# Altium PCB RC PCB v2.PcbDoc
Units mm, origin at the board's own origin, x right, y up, seen from the top; angles counter-clockwise.
Board outline 85.85 x 53.09 mm, 2 copper layers (Top Layer, Bottom Layer); 35 components, 26 nets, 122 pads, 13 vias.
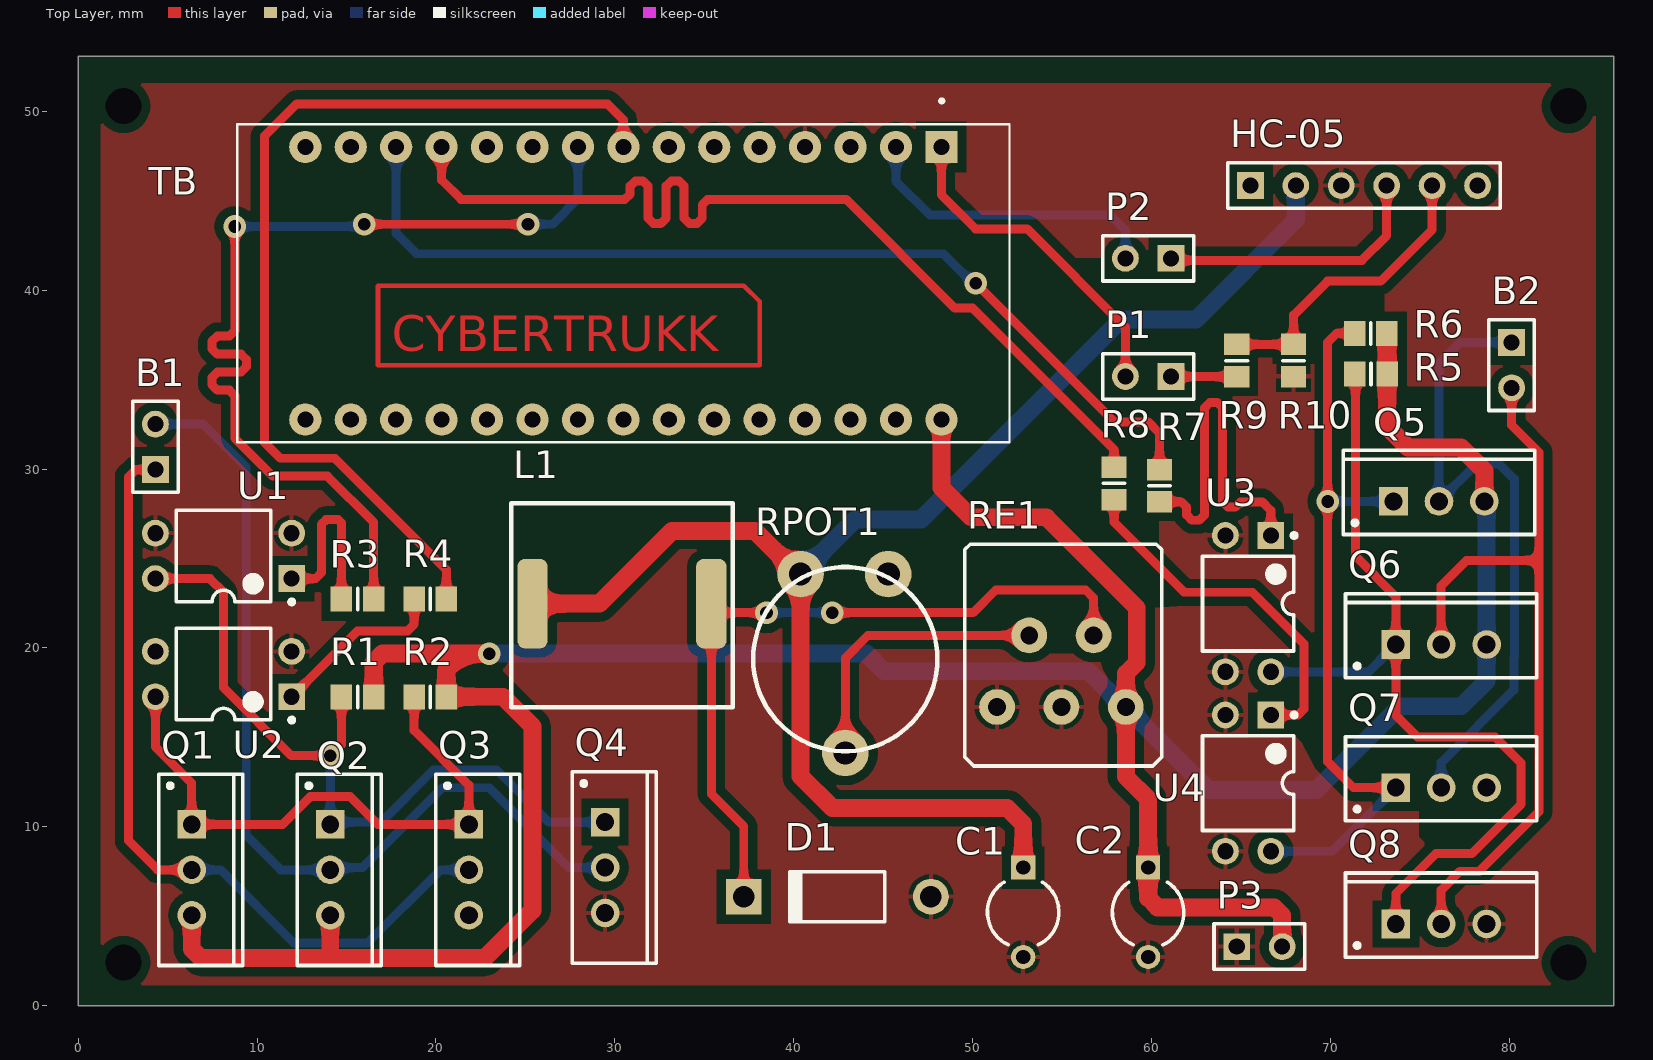
[diagram p0: Top Layer view]
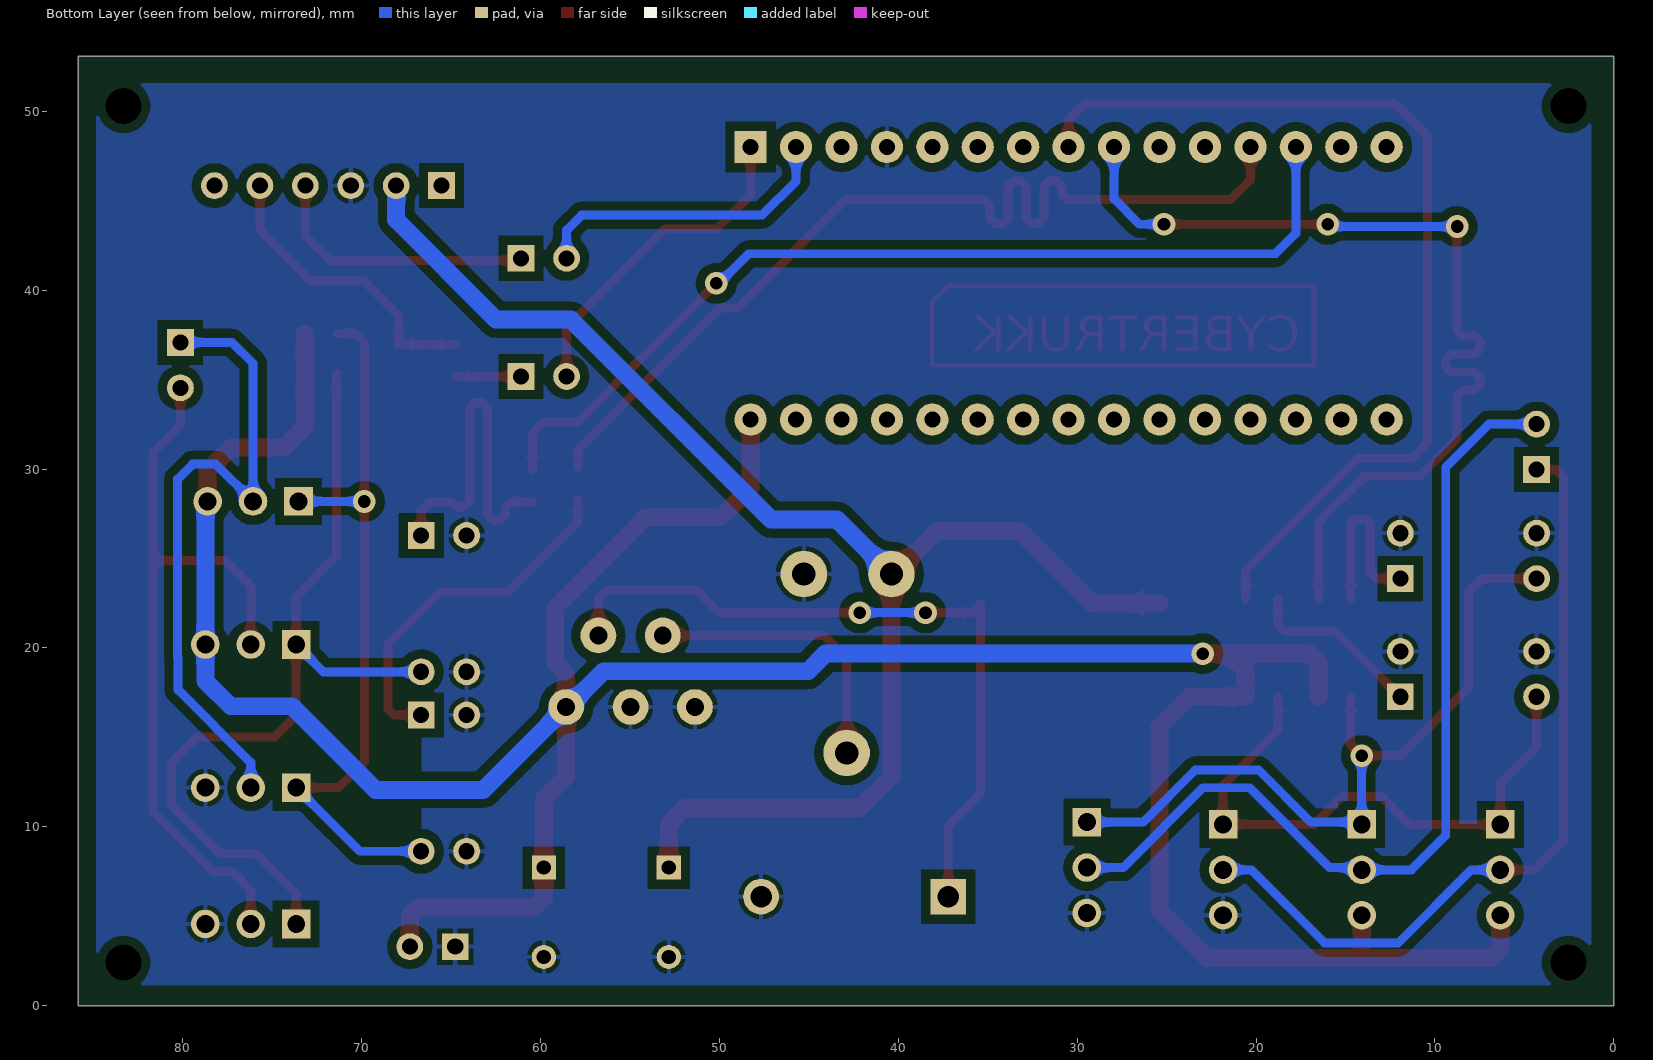
[diagram p1: Bottom Layer view, seen from below]

## Layer stack, top to bottom
Top Solder: solder mask 0.0102, Solder Resist, Dk 3.5
Top Layer: signal copper 0.0356
Dielectric 1: dielectric 0.32, FR-4, Dk 4.8
Bottom Layer: signal copper 0.0356
Bottom Solder: solder mask 0.0102, Solder Resist, Dk 3.5

## Board outline
0,0 85.852,0 85.852,53.086 0,53.086

## Design rules (kind name [scope] priority, off if disabled: settings)
Clearance [All] p1: gap=0.5 ignorepadtopadclearanceinfootprint=TRUE
HoleSize [All] p1: absolutevalues=TRUE maxlimit=2.54 minlimit=0.4 maxpercent=80.000 minpercent=20.000
MinimumSolderMaskSliver [All] p1: minsoldermaskwidth=0.13
PolygonConnect [All] p1: connectstyle=Relief reliefconductorwidth=0.254 reliefentries=4 polygonreliefangle="90 Angle" airgapwidth=0.254
RoutingVias [All] p1: holewidth=0.711 width=1.27 viastyle="Through Hole" minholewidth=0.711 minwidth=1.27 maxholewidth=0.711 maxwidth=1.27
SolderMaskExpansion [All] p1: expansion=0.3
Width POWER [InNetClass('PWR')] p1: maxlimit=2 minlimit=1 preferedwidth=1
Width [All] p2: maxlimit=1 minlimit=0.5 preferedwidth=0.5
28 further rules are at their usual default settings.

## Classes and differential pairs
component class "RC Brain Sch": HC-05 P1 P2 R9 R10 TB
component class "H-Bridge turning Sch": B1 Q1 Q2 Q3 Q4 R1 R2 R3 R4 U1 U2
component class "H-Bridge drive Sch": B2 Q5 Q6 Q7 Q8 R5 R6 R7 R8 U3 U4
component class "Buck_Converter Sch": C1 C2 D1 L1 P3 RE1 RPOT1

## Components (designator, comment, footprint, x,y, rotation, side; value= is the part's Value field where it differs from the comment)
B1 "Motor" HDR1X2 4.318,29.972 r90 top
B2 "Motor" HDR1X2 80.137,37.084 r270 top
C1 "Cap2" CAPR5-4X5 52.832,5.225 r270 top value=1mF
C2 "Cap2" CAPR5-4X5 59.817,5.225 r270 top value=100uF
D1 "Diode 11DQ03" DO-204AL 42.441,6.096 r180 top
HC-05 "Header" HDR1X6 65.532,45.847 r0 top
L1 "Inductor SMD 100 uH" "Inductor 100uH" 35.4,22.479 r180 top
P1 "Jumper" HDR1X2 61.087,35.179 r180 top
P2 "Jumper" HDR1X2 61.087,41.783 r180 top
P3 "Header 2" HDR1X2 64.77,3.302 r0 top
Q1 "PMOS-2" TO-220AB 6.35,7.598 r270 top
Q2 "PMOS-2" TO-220AB 14.097,7.598 r270 top
Q3 "NMOS-2" TO-220AB 21.844,7.598 r270 top
Q4 "NMOS-2" TO-220AB 29.464,7.725 r270 top
Q5 "PMOS-2" TO-220AB 76.073,28.194 r0 top
Q6 "PMOS-2" TO-220AB 76.2,20.193 r0 top
Q7 "NMOS-2" TO-220AB 76.2,12.192 r0 top
Q8 "NMOS-2" TO-220AB 76.2,4.572 r0 top
R1 "Res1" 6-0805_N 15.621,17.272 r0 top value=10k
R2 "Res1" 6-0805_N 19.685,17.272 r0 top value=10k
R3 "Res1" 6-0805_N 15.621,22.733 r0 top value=330
R4 "Res1" 6-0805_N 19.685,22.733 r0 top value=330
R5 "Res1" 6-0805_N 72.274,35.306 r0 top value=10k
R6 "Res1" 6-0805_N 72.263,37.592 r0 top value=10k
R7 "Res1" 6-0805_N 60.452,29.072 r90 top value=330
R8 "Res1" 6-0805_N 57.912,29.199 r90 top value=330
R9 "Res1" 6-0805_N 64.77,36.068 r270 top value=1.8k
R10 "Res1" 6-0805_N 67.945,36.068 r90 top value=1k
RE1 "LM2576HV" LM2576 58.569,16.701 r180 top
RPOT1 "Potentiometer" "Potentiometer 10k" 40.386,24.13 r180 top
TB "ARDUINO_NANO" *SHIELD_ARDUINO_NANO 30.48,40.386 r270 top
U1 "Optoisolator1" DIP-4 8.128,25.146 r180 top
U2 "Optoisolator1" DIP-4 8.128,18.542 r180 top
U3 "Optoisolator1" DIP-4 65.405,22.479 r270 top
U4 "Optoisolator1" DIP-4 65.405,12.446 r270 top

## Footprints (in the part's own frame and the unit in brackets; to place one, negate y for a bottom-side part, rotate by r counter-clockwise, add the part's x,y. Pads: shape width x height; smd on the part's side, far side on the other; paste and mask are expansions set on the pad)
6-0805_N [mm] "Chip Resistor, Body 2.0x1.2mm, IPC Medium Density"
  rect 1.2x1.4 smd: 1(-0.9,0) 2(0.9,0)
  silkscreen extent 0,-0.6 0,0.6, body extent -1.07,-0.7 1.07,0.7, height 0.7
*SHIELD_ARDUINO_NANO [mm]
  rect 1.8x1.8 hole 0.9: 1(-7.62,17.78)
  round 1.8 hole 0.9: 2(-7.62,15.24) 3(-7.62,12.7) 4(-7.62,10.16) 5(-7.62,7.62) 6(-7.62,5.08) 7(-7.62,2.54) 8(-7.62,0) 9(-7.62,-2.54) 10(-7.62,-5.08) 11(-7.62,-7.62) 12(-7.62,-10.16) 13(-7.62,-12.7) 14(-7.62,-15.24) 15(-7.62,-17.78) 16(7.62,-17.78) 17(7.62,-15.24) 18(7.62,-12.7) 19(7.62,-10.16) 20(7.62,-7.62) 21(7.62,-5.08) 22(7.62,-2.54) 23(7.62,0) 24(7.62,2.54) 25(7.62,5.08) 26(7.62,7.62) 27(7.62,10.16) 28(7.62,12.7) 29(7.62,15.24) 30(7.62,17.78)
  silkscreen extent -10.3,-21.59 8.89,21.59, body extent -9.2,-23.52 9.07,22.13, height 15.25
CAPR5-4X5 [mm] "Capacitor; 2 Leads"
  rect 1.35x1.35 hole 0.8: 1(-2.5,0)
  round 1.35 hole 0.8: 2(2.5,0)
  silkscreen extent -1.69,-2 1.82,2
DIP-4 [mm] "DIP; 4 Leads; Row Spacing 7.62 mm; Pitch 2.54 mm"
  rect 1.5x1.5 hole 0.9: 1(-3.81,1.27)
  round 1.5 hole 0.9: 2(-3.81,-1.27) 3(3.81,-1.27) 4(3.81,1.27)
  silkscreen extent -3.94,-2.55 2.65,2.69, body extent -3.15,-2.5 3.15,2.5, height 5.6
DO-204AL [mm] "Diode, Axial; Body 5.2 x 2.7 mm (LxDia. max), Lead Dia. 0.86 mm (max)"
  round 2 hole 1.2: 1(-5.23,0)
  rect 2x2 hole 1.2: 2(5.23,0)
  silkscreen extent -2.65,-1.4 2.75,1.4
HDR1X2 [mm] "Connector; Header; 2 Position"
  rect 1.5x1.5 hole 0.9: 1(0,0)
  round 1.5 hole 0.9: 2(2.54,0)
  silkscreen extent -1.27,-1.27 3.81,1.27
HDR1X6 [mm] "Connector; Header; 6 Position"
  rect 1.5x1.5 hole 0.9: 1(0,0)
  round 1.5 hole 0.9: 2(2.54,0) 3(5.08,0) 4(7.62,0) 5(10.16,0) 6(12.7,0)
  silkscreen extent -1.27,-1.27 13.97,1.27
"Inductor 100uH" [mm] "Inductor 100uH"
  rrect50% 1.7x5 smd: 1(0,0) 2(10,0)
  silkscreen extent -1.2,-5.6 11.2,5.8, body extent -1.25,-6.25 11.25,6.25, height 8.3
LM2576 [mm]
  round 2 hole 1: 1(0,0) 2(1.8,-4) 3(3.6,0) 4(5.4,-4) 5(7.2,0)
  silkscreen extent -2,-9.1 9,3.3, body extent -2,-8 9.1,0.43, height 18
"Potentiometer 10k" [mm] "Potentiometer 10k"
  round 2.6 hole 1.3: 1(-4.9,0) 2(0,0) 3(-2.5,10)
  silkscreen extent -7.65,-0.4 2.65,9.9, body extent -7.65,-0.35 2.65,10.25, height 6.26
TO-220AB [mm] "TO, Thru-Hole, Vertical, Heatsink Mounted; 3 In-Line Leads; Pitch 2.54 mm"
  rect 1.6x1.6 hole 1: 1(-2.54,0)
  round 1.6 hole 1: 2(0,0) 3(2.54,0)
  silkscreen extent -5.35,-1.85 5.35,2.85, body extent -5.4,-1.9 5.4,2.9, height 19.3

## Part data
B1 B2: "Motor, General Kind", LatestRevisionDate=17-Jul-2002, LatestRevisionNote="Re-released for DXP Platform.", PackageDescription="Capacitor (Radial); 2 Leads", PackageReference=RB5-10.5, Published=24-Mar-1999, Publisher="Altium Limited"
C1 C2: "Capacitor", PackageDescription="Capacitor; 2 Leads", PackageReference=CAPR5-4X5, Published=23-Sep-2002, Publisher="Altium Limited"
D1: "Schottky Rectifier", Code_JEDEC=DO-204-AL, ComponentLink1Description="Manufacturer Link", ComponentLink1URL=http://www.irf.com/, ComponentLink2Description=Datasheet, ComponentLink2URL=http://www.irf.com/product-info/datasheets/data/11dq03.pdf, DatasheetVersion=Dec-1997, LatestRevisionDate=17-Jul-2002, LatestRevisionNote="Re-released for DXP Platform.", PackageDescription="Diode, Axial; Body 5.2 x 2.7 mm (LxDia. max), Lead Dia. 0.86 mm (max)", PackageReference=DO-204AL, Published=8-Jun-2000, Publisher="Altium Limited"
HC-05: library part "Header 6", "Header, 6-Pin", LatestRevisionDate=17-Jul-2002, LatestRevisionNote="Re-released for DXP Platform.", Publisher="Altium Limited"
P1 P2: library part "Header 2", "Header, 2-Pin", LatestRevisionDate=17-Jul-2002, LatestRevisionNote="Re-released for DXP Platform.", Publisher="Altium Limited"
P3: "Header, 2-Pin", LatestRevisionDate=17-Jul-2002, LatestRevisionNote="Re-released for DXP Platform.", Publisher="Altium Limited"
Q1 Q2 Q5 Q6: "P-Channel Power MOSFET", ComponentLink1Description="Manufacturer Link", ComponentLink1URL=http://www.irf.com/, DatasheetVersion=PD-9.390D, LatestRevisionDate=17-Jul-2002, LatestRevisionNote="Re-released for DXP Platform.", Note="Pin 4 not drawn and electrically connected to Pin 2.", PackageDescription="TO, Thru-Hole, Vertical, Heatsink Mounted; 3 In-Line Leads; Pitch 2.54 mm", PackageReference=TO-220AB, PackageVersion=Feb-1997, Published=8-Jun-2000, Publisher="Altium Limited"
Q3 Q4 Q7 Q8: "N-Channel Power MOSFET", ComponentLink1Description="Manufacturer Link", ComponentLink1URL=http://www.irf.com/, DatasheetVersion=PD-9.814, LatestRevisionDate=17-Jul-2002, LatestRevisionNote="Re-released for DXP Platform.", Note="Pin 2 is electrically connected to pin 4.", PackageDescription="TO, Thru-Hole, Vertical, Heatsink Mounted; 3 In-Line Leads; Pitch 2.54 mm", PackageReference=TO-220AB, PackageVersion=Feb-1997, Published=8-Jun-2000, Publisher="Altium Limited"
R1 R2 R3 R4 R5 R6 R7 R8 R9 R10: "Resistor", LatestRevisionDate=17-Jul-2002, LatestRevisionNote="Re-released for DXP Platform.", PackageDescription="Axial Device, Thru-Hole; 2 Leads; 0.3 in Pin Spacing", PackageReference=AXIAL-0.3, Published=8-Jun-2000, Publisher="Altium Limited"
RPOT1: "potentiometer 10k"
TB: "ATmega328 Arduino Nano AVR® ATmega AVR MCU 8-Bit Embedded Evaluation Board", Package=None, Availability=Unavailable, MF=Arduino, MP="ARDUINO NANO", Price=None, SnapEDA_Link=https://www.snapeda.com/parts/ARDUINO%20NANO/Arduino/view-part/1128261/?ref=snap
U1 U2 U3 U4: "4-Pin Phototransistor Optocoupler", DatasheetVersion=Nov-2003, LatestRevisionDate=04-Mar-2005, LatestRevisionNote="Sch pins 3 & 4 Swapped.", PackageReference=DIP-4, Published=24-Mar-1999, Publisher="Altium Limited"

## Via types
v1: diameter 1.27, hole 0.711, Top Layer to Bottom Layer, 9 vias
v2: diameter 1.27/1.27 (per signal layer), hole 2, Top Layer to Bottom Layer, 4 vias

## Nets (pads, with @x,y where several pads share a name; then routed paths per layer and width w, separated by ;. In a path a pad name is that pad's centre, name@x,y a point inside that pad or via, vN(x,y) a via of type N, cw(c..) or ccw(c..) an arc to the next point about the centre after c; other vN are vias at no path point)
9V_pwr: C2.1 P3.2 Q1.3 Q2.3 Q5.3 Q6.3 R1.2 R2.2 R5.2 R6.2 RE1.1 TB.30 | length 180.9
  Top Layer w1: Q1.3 6.35,3.175 6.858,2.667 14.224,2.667 ; Q2.3 14.097,2.794 14.224,2.667 ; R1.2 16.521,19.188 17.018,19.685 21.463,19.685 ; v1(22.987,19.685) 21.463,19.685 ; TB.30 48.26,28.956 49.911,27.305 54.126,27.305 59.182,22.249 59.182,19.177 58.569,18.564 RE1.1 58.569,12.805 59.817,11.557 C2.1 59.817,6.032 60.349,5.499 66.869,5.499 67.31,5.058 P3.2 ; R6.2 73.174,37.581 R5.2 73.174,32.374 74.349,31.199 77.314,31.199 78.613,29.9 Q5.3 ; 14.224,2.667 22.733,2.667 25.4,5.334 25.4,15.621 23.749,17.272 R2.2 20.585,18.807 21.463,19.685
  Bottom Layer w1: v1(22.987,19.685) 44.069,19.685 45.053,18.701 52.341,18.701 54.141,18.701 56.483,18.701 58.483,16.701 RE1.1 63.205,12.065 69.215,12.065 73.893,16.743 77.322,16.743 78.74,18.161 Q6.3 78.74,28.067 Q5.3
B_5V: C1.1 HC-05.2 L1.2 RPOT1.2 | length 82.8
  Top Layer w1: L1.2 29.138,22.479 33.202,26.543 37.846,26.543 40.259,24.13 RPOT1.2 40.386,12.827 42.164,11.049 51.943,11.049 52.832,10.16 C1.1
  Bottom Layer w1: RPOT1.2 43.434,27.178 47.117,27.178 58.293,38.354 62.484,38.354 68.072,43.942 HC-05.2
D5_PWM: R4.2 TB.8 | length 54.6
  Top Layer w0.5: R4.2 20.585,24.373 14.351,30.607 11.303,30.607 10.414,31.496 10.414,48.611 12.222,50.419 29.591,50.419 30.48,49.53 TB.8
D6_PWM: R3.2 TB.9 | length 53.6
  Top Layer w0.5: v1(8.763,43.561) 8.763,37.739 8.461,37.437 7.78,37.437 7.478,37.135 7.478,36.731 7.78,36.429 8.763,36.429 9.105,36.429 9.408,36.127 9.408,35.723 9.105,35.421 8.763,35.421 7.78,35.421 7.478,35.119 7.478,34.715 7.78,34.413 8.461,34.413 8.763,34.111 8.763,33.909 8.763,31.733 10.889,29.607 13.937,29.607 16.521,27.023 R3.2 ; v1(16.002,43.688) v1(25.146,43.688)
  Bottom Layer w0.5: v1(8.763,43.561) 15.875,43.561 v1(16.002,43.688) ; v1(25.146,43.688) 26.525,43.688 27.94,45.103 TB.9
D9_PWM: R8.2 TB.12 | length 54.5
  Top Layer w0.5: TB.12 20.32,46.162 21.409,45.073 30.353,45.073 30.555,45.073 30.857,45.375 30.857,45.814 31.159,46.116 31.563,46.116 31.865,45.814 31.865,45.073 31.865,44.025 32.167,43.722 32.571,43.722 32.873,44.025 32.873,45.073 32.873,45.814 33.175,46.116 33.579,46.116 33.881,45.814 33.881,45.073 33.881,44.025 34.183,43.722 34.587,43.722 34.889,44.025 34.889,44.771 35.191,45.073 39.751,45.073 42.938,45.073 49.01,39.001 50.005,39.001 57.912,31.094 R8.2
D10_PWM: R7.2 TB.13 | length 54.2
  Top Layer w0.5: v1(50.176,40.386) 57.923,32.639 59.817,32.639 60.452,32.004 R7.2
  Bottom Layer w0.5: TB.13 17.78,43.18 18.923,42.037 48.37,42.037 50.021,40.386 v1(50.176,40.386)
GND: C1.2 C2.2 D1.1 HC-05.3 P3.1 Q3.3 Q4.3 Q7.3 Q8.3 R10.1 RE1.3 RE1.5 RPOT1.1 TB.4 U1.2 U1.3 U2.2 U2.3 U3.2 U3.3 U4.2 U4.3
HC_RX: P1.1 R9.2 | length 3.7
  Top Layer w0.5: P1.1 61.098,35.168 R9.2
HC_TX: HC-05.4 P2.1 | length 15.5
  Top Layer w0.5: P2.1 61.202,41.668 71.767,41.668 73.152,43.053 HC-05.4
NANO_RX: P2.2 TB.2 | length 17.4
  Bottom Layer w0.5: TB.2 45.72,46.101 47.625,44.196 57.708,44.196 58.547,43.357 P2.2
NANO_TX: P1.2 TB.1 | length 18.8
  Top Layer w0.5: TB.1 48.26,45.339 50.165,43.434 53.054,43.434 58.547,37.941 P1.2
NetB1_1: B1.1 Q1.2 Q3.2 | length 45.1
  Top Layer w0.5: B1.1 3.217,29.972 2.818,29.573 2.818,9.228 4.448,7.598 Q1.2
  Bottom Layer w0.5: Q1.2 7.969,7.598 12.059,3.508 16.173,3.508 20.263,7.598 Q3.2
NetB1_2: B1.2 Q2.2 Q4.2 | length 51.3
  Bottom Layer w0.5: B1.2 6.985,32.512 9.398,30.099 9.398,9.525 11.325,7.598 Q2.2 14.224,7.725 15.894,7.725 20.357,12.188 22.974,12.188 27.437,7.725 Q4.2
NetB2_1: B2.1 Q5.2 Q7.2 | length 36.6
  Bottom Layer w0.5: Q7.2 76.2,13.589 80.264,17.653 80.264,19.499 80.29,19.525 80.29,29.438 79.449,30.279 78.158,30.279 Q5.2 76.073,35.903 77.254,37.084 B2.1
NetB2_2: B2.2 Q6.2 Q8.2 | length 42.8
  Top Layer w0.5: Q8.2 76.2,6.46 77.249,7.509 78.319,7.509 81.661,10.851 81.661,24.892 ; Q6.2 76.2,23.473 77.619,24.892 81.661,24.892 ; B2.2 80.137,32.464 81.661,30.94 81.661,24.892
NetD1_2: D1.2 L1.1 RE1.2 | length 41.5
  Top Layer w0.5: D1.2 37.211,10.033 35.4,11.844 L1.1 35.908,21.971 v1(38.481,21.971) ; v1(42.164,21.971) 50.038,21.971 51.308,23.241 56.321,23.241 56.769,22.793 RE1.2
  Bottom Layer w0.5: v1(38.481,21.971) v1(42.164,21.971)
NetHC-05_5: HC-05.5 R9.1 R10.2 | length 17
  Top Layer w0.5: R9.1 R10.2 67.945,38.608 69.85,40.513 72.82,40.513 75.692,43.385 HC-05.5
NetQ1_1: Q1.1 Q3.1 R2.1 U2.4 | length 33.2
  Top Layer w0.5: U2.4 4.318,14.481 6.35,12.449 Q1.1 11.436,10.138 12.986,11.688 15.208,11.688 16.758,10.138 Q3.1 21.844,12.334 18.785,15.393 R2.1
NetQ2_1: Q2.1 Q4.1 R1.1 U1.4 | length 42.2
  Top Layer w0.5: U1.4 7.366,23.876 8.128,23.114 8.128,17.78 11.927,13.981 v1(14.097,13.981) 14.721,14.605 R1.1
  Bottom Layer w0.5: v1(14.097,13.981) Q2.1 14.224,10.265 16.943,10.265 19.866,13.188 23.388,13.188 26.311,10.265 Q4.1
NetQ5_1: Q5.1 Q7.1 R6.1 U4.4 | length 41.7
  Top Layer w0.5: R6.1 70.358,37.592 69.85,37.084 v1(69.85,28.194) 69.85,13.639 71.297,12.192 Q7.1
  Bottom Layer w0.5: U4.4 70.104,8.636 Q7.1 ; v1(69.85,28.194) Q5.1
NetQ6_1: Q6.1 Q8.1 R5.1 U3.4 | length 48.8
  Top Layer w0.5: R5.1 71.409,35.271 71.409,25.122 73.66,22.871 Q6.1 73.66,16.239 74.872,15.028 79.199,15.028 80.661,13.566 80.661,11.266 77.904,8.509 75.895,8.509 73.66,6.274 Q8.1
  Bottom Layer w0.5: U3.4 72.136,18.669 Q6.1
NetR3_1: R3.1 U1.1 | length 10.1
  Top Layer w0.5: U1.1 13.271,23.876 13.6,24.205 13.6,26.913 13.865,27.178 14.531,27.178 14.721,26.988 R3.1
NetR4_1: R4.1 U2.1 | length 9.9
  Top Layer w0.5: U2.1 15.621,20.955 18.415,20.955 18.785,21.325 R4.1
NetR7_1: R7.1 U3.1 | length 20.5
  Top Layer w0.5: R7.1 60.956,28.172 61.662,28.172 61.964,27.87 61.964,27.441 62.266,27.139 62.67,27.139 62.972,27.441 62.972,28.172 62.972,33.421 63.274,33.724 63.678,33.724 63.98,33.421 63.98,28.172 64.282,27.87 64.686,27.87 64.988,28.172 64.988,28.084 65.076,28.172 66.189,28.172 66.675,27.686 U3.1
NetR8_1: R8.1 U4.1 | length 20.3
  Top Layer w0.5: R8.1 57.912,27.031 61.829,23.114 65.642,23.114 68.528,20.228 68.528,16.585 68.199,16.256 U4.1
NetRE1_4: RE1.4 RPOT1.3 | length 16.1
  Top Layer w0.5: RPOT1.3 42.886,19.431 44.156,20.701 RE1.4
pads on no net: HC-05.1 HC-05.6 TB.3 TB.5 TB.6 TB.7 TB.10 TB.11 TB.14 TB.15 TB.16 TB.17 TB.18 TB.19 TB.20 TB.21 TB.22 TB.23 TB.24 TB.25 TB.26 TB.27 TB.28 TB.29
copper on no net: | length 51
  Top Layer w0.254: 16.764,35.814 16.764,40.259 37.211,40.259 38.1,39.37 38.1,35.814 16.764,35.814
  other v2: 2.54,2.413 83.312,2.413 2.54,50.292 83.312,50.292

## Polygon pours and split planes (outlines as drawn)
GND on Top Layer "Top Layer-GND" (solid, pour order 22): 1.27,51.562 84.836,51.562 84.836,1.143 1.27,1.143
GND on Top Layer "Top Layer-GND 1" (solid, pour order 24): -2.667,10.541
no net on Top Layer "Top Layer-No Net" (solid, pour order 2): 2.032,51.435
no net on Top Layer "Top Layer-No Net 1" (solid, pour order 0): 1.27,51.689
GND on Bottom Layer "Bottom Layer-GND" (solid, pour order 18): 1.27,51.562 84.836,51.562 84.836,1.143 82.169,1.143 1.27,1.143
GND on Bottom Layer "Bottom Layer-GND 1" (solid, pour order 10): 35.56,25.146

## Other copper
Top Layer:
  pour cut-out: 38.1,48.006
  pour cut-out: 62.266,22.385 60.058,23.234 59.69,22.225
  pour cut-out: 61.829,23.114
  pour cut-out: 61.829,23.114
  pour cut-out: 61.843,23.063
  pour cut-out: 59.182,22.249 60.349,22.606 61.843,23.063 57.785,27.121 57.785,31.221 50.005,39.001 48.871,39.001 42.799,45.073 21.409,45.073 20.32,46.162 20.32,48.006 10.414,48.006 10.414,32.639 48.133,32.639 48.26,32.766 48.26,28.956 49.911,27.305 54.102,27.305
  pour cut-out: 14.753,10.411 14.778,10.386 16.51,10.386 16.758,10.138 25.378,10.138 25.4,10.16 25.4,5.334 22.733,2.667 14.097,2.667 14.097,10.138
  pour cut-out: 12.7,32.766 48.26,32.766 48.26,28.956 49.911,27.305 54.126,27.305 56.793,24.638 56.769,24.614 56.769,22.793 56.321,23.241 51.308,23.241 50.038,21.971 42.164,21.971 42.164,22.352 37.973,26.543 33.202,26.543 29.138,22.479 25.4,22.479 25.4,20.318 24.767,19.685 22.987,19.685 20.585,22.087 20.585,24.373 14.351,30.607 12.7,30.607
  pour cut-out: 24.462,17.985 23.397,19.05 22.606,19.05 22.39,18.834 21.882,18.834 21.463,18.415 21.862,18.016 21.862,17.985
  pour cut-out: 14.097,2.794 13.97,2.667 6.858,2.667 6.35,3.175 6.35,10.138 11.436,10.138 12.954,11.656 14.065,11.656 14.097,11.688
  pour cut-out: 21.844,9.382 25.4,9.375 25.4,15.621 23.749,17.272 18.785,17.272 18.785,15.393 21.844,12.334
  pour cut-out: 30.48,48.006 12.7,48.006 11.303,49.403 11.206,49.403 12.222,50.419 29.591,50.419 30.48,49.53
  pour cut-out: 73.66,20.193 76.2,20.193 76.2,23.473 77.746,25.019 81.661,25.019 81.661,30.94 80.137,32.464 80.137,34.544 80.072,34.609 73.174,34.609 73.174,32.374 73.058,32.258 71.409,32.258 71.409,25.122 73.66,22.871
  pour cut-out: 73.66,20.193 76.2,20.193 76.2,23.473 77.619,24.892 81.661,24.892 81.661,13.843 80.384,13.843 79.241,14.986 74.913,14.986 73.66,16.239
  pour cut-out: 58.547,35.179 58.547,37.941 53.054,43.434 50.165,43.434 48.26,45.339 48.26,48.006 33.02,48.006 33.175,47.851 33.175,46.116 33.579,46.116 33.881,45.814 33.881,44.025 34.183,43.722 34.587,43.722 34.889,44.025 34.889,44.771 35.191,45.073 42.938,45.073 49.01,39.001 50.005,39.001 54.589,34.417
  pour cut-out: 54.705,41.783 58.547,37.941 58.547,35.179 58.558,35.168 64.77,35.168 64.77,36.968 67.945,36.968 67.945,38.608 69.85,40.513 69.85,41.783
  pour cut-out: 74.96,10.892 74.96,9.444 75.895,8.509 77.904,8.509 80.661,11.266 80.661,13.566 79.199,15.028 74.872,15.028 73.66,16.239 73.66,22.871 71.409,25.122 69.874,25.122 69.85,25.146 69.85,13.639 71.297,12.192 72.644,12.192
  pour cut-out: 57.923,32.639 59.817,32.639 60.452,32.004 60.432,31.984 60.432,24.511 57.912,27.031 57.912,31.094
  pour cut-out: 4.318,17.272 2.818,17.272 2.818,23.876 7.366,23.876 8.128,23.114 8.128,17.78 11.927,13.981 14.097,13.981 14.097,11.688 12.986,11.688 11.436,10.138 6.35,10.138 6.35,12.449 4.318,14.481
  pour cut-out: 12.988,16.263 12.988,17.653 13.481,18.145 13.929,18.145 13.929,16.296 13.937,16.288 14.224,16.288 14.224,14.859 13.846,14.481 12.153,14.481 10.693,15.941 10.693,16.002 10.812,16.002 11.049,16.239
  pour cut-out: 14.097,13.981 14.097,11.688 15.208,11.688 16.758,10.138 21.844,10.138 21.844,12.334 18.785,15.393 18.785,16.332 14.739,16.332 14.721,16.314 14.721,14.605
  pour cut-out: 14.097,13.981
  pour cut-out: 21.685,21.533 22.98,20.238 22.98,20.193 19.097,20.193 18.796,20.494 19.304,21.002 19.304,21.533
  pour cut-out: 56.134,35.168 56.896,35.505 57.788,36.068 58.547,35.309 58.547,35.179 61.087,35.179 61.731,34.535 61.731,34.417 62.738,34.417 62.738,33.634 62.474,33.37 62.484,33.359 62.484,30.734 61.166,30.734 60.956,30.944 60.956,32.208 60.868,32.208 59.902,33.174 58.166,33.174
  pour cut-out: 4.953,8.128 5.592,8.128 6.354,8.89 6.35,8.894 6.35,12.449 5.636,12.449 3.302,14.783 3.302,9.378
  pour cut-out: 17.071,23.749 20.066,23.749 20.066,24.205 17.283,26.988 17.074,26.988
  pour cut-out: 41.078,21.336 41.152,21.409 44.069,21.409 44.069,21.244 42.365,19.54 42.365,15.822 41.148,14.605
  pour cut-out: 61.212,31.072 62.474,31.072 62.484,31.082 62.484,28.321 61.937,28.321 61.468,28.79
  pour cut-out: 73.66,42.164 75.184,43.688 75.184,44.951 74.806,45.329 74.806,45.847 73.937,45.847 73.908,45.818 73.908,45.004 73.66,44.755
  pour cut-out: 73.152,45.847
  pour cut-out: 73.005,38.608 73.005,39.994 72.989,39.978 69.977,39.978 69.977,39.967 68.476,38.466 68.476,37.941 68.48,37.941 69.083,37.338 69.344,37.338 70.142,38.137 70.485,38.137 70.485,38.354 70.739,38.608
  pour cut-out: 67.737,15.389 68.395,14.732 69.195,13.261 69.215,13.281 69.215,16.588
  pour cut-out: 71.409,28.194 78.613,28.194 78.613,29.9 77.314,31.199 74.349,31.199 73.163,32.385 71.409,32.385
  pour cut-out: 56.769,20.701 57.277,18.825 58.569,16.701 58.569,20.701
  pour cut-out: 53.213,19.707 56.731,19.707 56.769,19.744 56.769,22.793 56.321,23.241 51.308,23.241 50.038,21.971 50.546,21.463 50.546,20.701
  pour cut-out: 35.4,22.479 35.4,26.51 35.433,26.543 37.973,26.543 40.386,24.13 40.386,22.479
  pour cut-out: 20.32,48.006 20.32,46.162 21.409,45.073 30.555,45.073 30.857,45.375 30.857,45.814 30.861,45.818 30.861,48.053
  pour cut-out: 16.51,40.504 16.646,40.64 37.394,40.64 37.394,40.469 38.533,39.329 38.391,39.187 38.391,35.56 16.775,35.56 16.521,35.814
  text "CYBERTRUKK" at 17.526,36.576 h2
Bottom Layer:
  pour cut-out: 6.35,10.138 6.35,7.598 7.969,7.598 12.059,3.508 14.116,3.508 14.119,3.511 14.119,7.62 11.347,7.62 11.325,7.598 9.398,9.525 9.398,10.011 9.525,10.138
  pour cut-out: 7.65,11.438
  pour cut-out: 6.35,11.448
  pour cut-out: 66.675,12.832 66.68,12.827 66.7,12.848 69.019,12.848 73.697,17.526 76.972,17.526 77.988,18.542 77.962,18.568 77.962,20.193 73.66,20.193 72.136,18.669 66.675,18.669
  pour cut-out: 66.68,11.303 66.68,8.641 66.675,8.636 70.104,8.636 73.66,12.192 76.2,12.192 76.2,13.589 78.68,16.069 74.243,16.069 69.477,11.303
  pour cut-out: 21.844,10.138 21.842,10.14 21.842,12.192 20.361,12.192 15.894,7.725 14.224,7.725 14.097,7.598 14.097,3.527 14.116,3.508 16.173,3.508 20.263,7.598 21.844,7.598
  pour cut-out: 17.78,48.006 17.78,43.18 18.923,42.037 25.4,42.037 25.146,42.291 25.146,43.688 26.525,43.688 27.94,45.103 27.94,48.006

## Silkscreen, mask and mechanical layers (free items; w line width, h text height)
Mechanical 13:
  the board outline again, w0.254